# Altium PCB OLED-0.96-Demo-MCU+Board.PcbDoc (part 2 of 2)
Units mil, origin at the board's own origin, x right, y up, seen from the top; angles counter-clockwise.
Board outline 1090.03 x 3263.03 mil, 2 copper layers (Top Layer, Bottom Layer); 60 components, 61 nets, 262 pads, 120 vias.
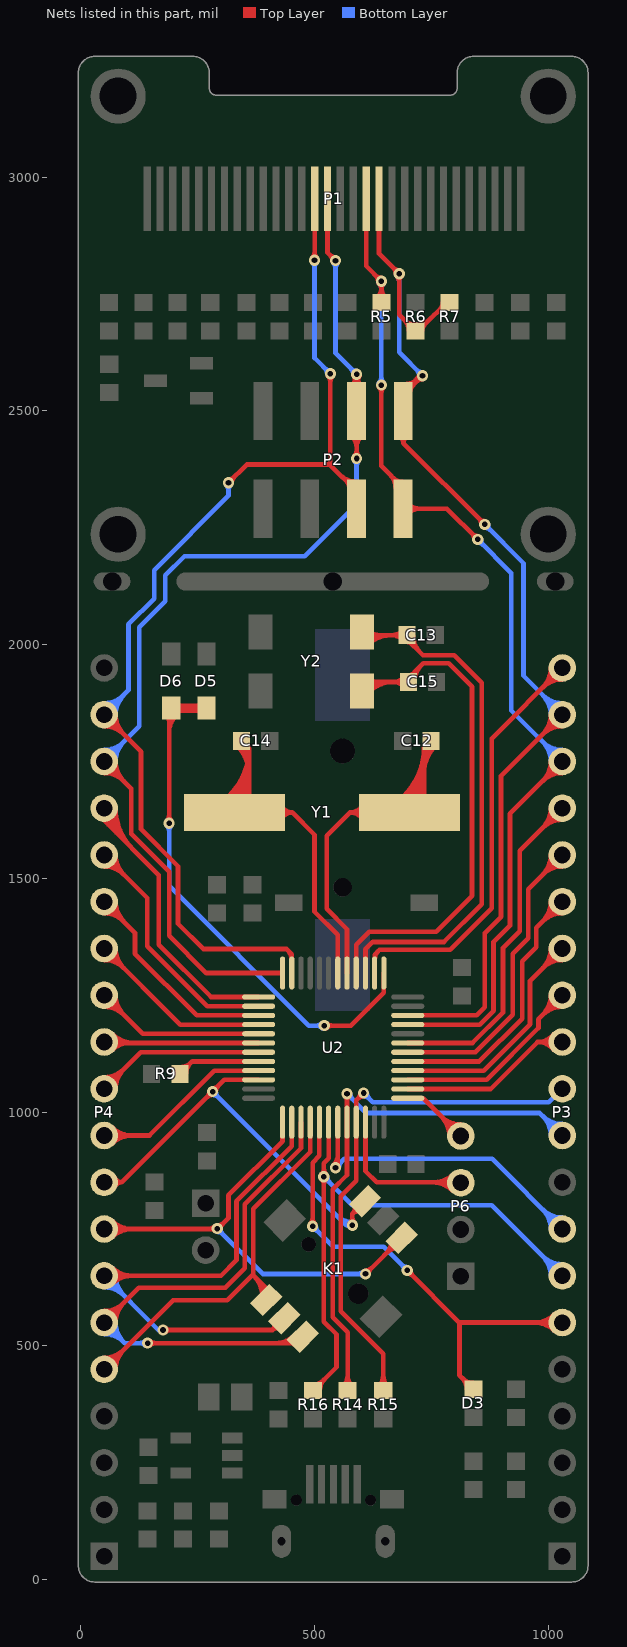
[diagram p2: the nets of this part, all layers, seen from the top]

## Via types
v1: diameter 24, hole 12, Top Layer to Bottom Layer, tented both sides, 120 vias

## Nets (pads, with @x,y where several pads share a name; then routed paths per layer and width w, separated by ;. In a path a pad name is that pad's centre, name@x,y a point inside that pad or via, vN(x,y) a via of type N, cw(c..) or ccw(c..) an arc to the next point about the centre after c; other vN are vias at no path point) (continued)
OLED_D0: P1.18 P2.2 P3.18 R5.2 U2.45 | length 2914.5
  Top Layer w10: P1.18@610.52,2953.2 610.52,2809.7 v1(643.01,2777.2) R5.2@643.01,2731.52 ; R5.2@633.6,2740.92 ccw(c610.89,2763.64) 643.01,2763.64 ccw(c675.14,2763.64) R5.2@652.42,2740.92 ; v1@636.01,2777.2 ccw(c619.11,2777.2) 631.06,2789.15 ccw(c643.01,2801.1) v1@643.01,2784.2 ; v1@638.05,2550.05 cw(c626.1,2538.1) 643,2538.1 cw(c659.9,2538.1) v1@647.95,2550.05 ; v1@638.06,2772.25 cw(c626.11,2760.3) 643.01,2760.3 cw(c659.91,2760.3) v1@647.96,2772.25 ; v1(643,2555) 643,2382 689.01,2335.99 P2.2@689.01,2290.7 783.3,2290.7 v1(849,2225) ; 661.18,2363.82 cw(c630.38,2333.02) P2.2@673.94,2333.02 ; 668.33,2356.67 ccw(c689.01,2377.35) P2.2@689.01,2348.1 ; U2.45@699.45,1187.21 853.17,1187.21 883,1217.04 883,1364 918,1399 918,1638 P3.18@1030,1750 ; P2.2@699.68,2280.04 cw(c725.42,2254.3) 725.42,2290.7 cw(c725.42,2327.1) P2.2@699.68,2301.36 ; v1@842,2225 ccw(c825.1,2225) 837.05,2236.95 ccw(c849,2248.9) v1@849,2232 ; P3.18@1005.47,1750 cw(c946.26,1750) 988.13,1708.13 cw(c1030,1666.26) P3.18@1030,1725.47 ; P3.18@1015.47,1750 cw(c980.4,1750) 1005.2,1725.2 cw(c1030,1700.4) P3.18@1030,1735.47
  Bottom Layer w10: v1@638.05,2559.95 ccw(c626.07,2571.93) 643.01,2571.93 ; v1@638.06,2772.25 cw(c626.11,2760.3) 643.01,2760.3 cw(c659.91,2760.3) v1@647.96,2772.25 ; v1(643,2555) v1(643.01,2777.2) ; 643.01,2571.87 ccw(c659.87,2571.87) v1@647.95,2559.95 ; v1@849,2218 cw(c849,2201.1) 860.95,2213.05 cw(c872.9,2225) v1@856,2225 ; v1(849,2225) 921,2153 921,1859 P3.18@1030,1750 ; P3.18@1005.47,1750 ccw(c946.26,1750) 988.13,1791.87 ccw(c1030,1833.74) P3.18@1030,1774.53 ; P3.18@1015.47,1750 ccw(c980.4,1750) 1005.2,1774.8 ccw(c1030,1799.6) P3.18@1030,1764.53
OLED_D1: P1.19 P2.1 P3.19 R6.1 R7.2 U2.46 | length 3175.1
  Top Layer w10: P1.19@638.08,2953.2 638.08,2836.14 v1(681.01,2793.2) 681.01,2705.89 R6.1@716.01,2670.89 721.7,2670.89 782.33,2731.52 R7.2@789.01,2731.52 ; v1@674.01,2793.2 ccw(c657.11,2793.2) 669.06,2805.15 ccw(c681.01,2817.1) v1@681.01,2800.2 ; v1@676.06,2788.25 cw(c664.11,2776.3) 681.01,2776.3 cw(c697.91,2776.3) v1@685.96,2788.25 ; P2.1@682.36,2444.39 cw(c674.46,2430.99) 690.01,2430.99 ; P2.1@690.01,2547.1 ccw(c690.01,2578.7) 712.36,2556.36 ; P2.1@690.01,2557.1 ccw(c690.01,2612.84) v1@729.43,2573.43 ; 691.62,2695.28 cw(c667.22,2670.89) R6.1@701.72,2670.89 ; 693.99,2692.91 ccw(c715.03,2713.94) R6.1@715.03,2684.19 ; P2.1@697.67,2444.39 ccw(c705.57,2430.99) 690.01,2430.99 ; U2.46@699.45,1206.9 846.9,1206.9 864,1224 864,1383 899,1418 899,1719 P3.19@1030,1850 ; P2.1@705.09,2542.02 cw(c722.16,2542.02) P2.1@710.09,2554.09 ; 715.45,2565.36 ccw(c706.02,2581.69) v1@724.24,2576.81 ; R6.1@717,2684.19 ccw(c717,2727.67) 747.74,2696.93 ; 717.86,2566.75 cw(c725.32,2553.81) v1@729.19,2568.24 ; v1@724,2575 cw(c707.1,2575) 719.05,2563.05 cw(c731,2551.1) v1@731,2568 ; R6.1@730.31,2670.89 cw(c751.08,2670.89) 736.39,2685.58 ; v1(731,2575) 690.01,2534.01 P2.1@690.01,2499.7 690.01,2430.99 ; 755.58,2704.77 cw(c788.03,2672.32) R7.2@788.03,2718.21 ; 769.34,2718.53 ccw(c756.36,2731.52) R7.2@774.72,2731.52 ; v1@857,2257 ccw(c840.1,2257) 852.05,2268.95 ccw(c864,2280.9) v1@864,2264 ; v1(864,2257) 690.01,2430.99 ; P3.19@1005.47,1850 cw(c946.26,1850) 988.13,1808.13 cw(c1030,1766.26) P3.19@1030,1825.47 ; P3.19@1015.47,1850 cw(c980.4,1850) 1005.2,1825.2 cw(c1030,1800.4) P3.19@1030,1835.47
  Bottom Layer w10: v1@676.06,2788.25 cw(c664.11,2776.3) 681.01,2776.3 cw(c697.91,2776.3) v1@685.96,2788.25 ; v1(681.01,2793.2) 681.01,2624.99 v1(731,2575) ; v1@724,2575 ccw(c707.1,2575) 719.05,2586.95 ccw(c731,2598.9) v1@731,2582 ; v1@864,2250 cw(c864,2233.1) 875.95,2245.05 cw(c887.9,2257) v1@871,2257 ; v1(864,2257) 947,2174 947,1933 P3.19@1030,1850 ; P3.19@1005.47,1850 ccw(c946.26,1850) 988.13,1891.87 ccw(c1030,1933.74) P3.19@1030,1874.53 ; P3.19@1015.47,1850 ccw(c980.4,1850) 1005.2,1874.8 ccw(c1030,1899.6) P3.19@1030,1864.53
OLED_DC: P1.15 P2.3 P4.18 U2.12 | length 2931.3
  Top Layer w10: P4.18@50,1725.47 cw(c50,1666.26) 91.87,1708.13 cw(c133.74,1750) P4.18@74.53,1750 ; P4.18@50,1735.47 cw(c50,1700.4) 74.8,1725.2 cw(c99.6,1750) P4.18@64.53,1750 ; P4.18@50,1750 108,1692 108,1595 189,1514 189,1377 268.55,1297.45 U2.12@431.73,1297.45 ; P1.15@527.84,2953.2 527.84,2838.37 v1(545.01,2821.2) ; v1@538.01,2821.2 ccw(c521.11,2821.2) 533.06,2833.15 ccw(c545.01,2845.1) v1@545.01,2828.2 ; P2.3@579.35,2446.71 cw(c553.61,2420.97) 590.01,2420.97 cw(c626.42,2420.97) P2.3@600.68,2446.71 ; P2.3@579.44,2552.78 ccw(c554.67,2577.98) v1(590.01,2577.99) ; v1@583.95,2574.49 cw(c569.32,2566.04) 585.64,2561.66 cw(c601.96,2557.29) v1@593.51,2571.92 ; v1@585.05,2402.95 ccw(c573.07,2414.93) 590.01,2414.93 ; v1@585.06,2573.04 cw(c573.11,2561.09) 590.01,2561.09 cw(c606.91,2561.09) v1@594.96,2573.04 ; v1@586.51,2571.92 cw(c578.07,2557.29) 594.39,2561.66 cw(c610.71,2566.04) v1@596.08,2574.49 ; v1(590,2398) P2.3@590.01,2499.7 v1(590.01,2577.99) ; 590.01,2414.87 ccw(c606.87,2414.87) v1@594.95,2402.95 ; P2.3@600.58,2552.78 cw(c625.36,2577.98) v1(590.01,2577.99)
  Bottom Layer w10: P4.18@50,1750 125,1825 125,2037 181,2093 181,2148 222,2189 479,2189 590,2300 v1(590,2398) ; P4.18@50,1764.53 ccw(c50,1799.6) 74.8,1774.8 ccw(c99.6,1750) P4.18@64.53,1750 ; P4.18@50,1774.53 ccw(c50,1833.74) 91.87,1791.87 ccw(c133.74,1750) P4.18@74.53,1750 ; v1@540.06,2816.25 cw(c528.11,2804.3) 545.01,2804.3 cw(c561.91,2804.3) v1@549.96,2816.25 ; v1(545.01,2821.2) 545.01,2622.99 v1(590.01,2577.99) ; v1@583.01,2577.99 ccw(c566.11,2577.99) 578.06,2589.94 ccw(c590.01,2601.89) v1@590.01,2584.99 ; v1@585.05,2393.05 cw(c573.1,2381.1) 590,2381.1 cw(c606.9,2381.1) v1@594.95,2393.05
OLED_RES: P1.14 P2.4 P4.19 U2.11 | length 2915.5
  Top Layer w10: P4.19@50,1825.47 cw(c50,1766.26) 91.87,1808.13 cw(c133.74,1850) P4.19@74.53,1850 ; P4.19@50,1835.47 cw(c50,1800.4) 74.8,1825.2 cw(c99.6,1850) P4.19@64.53,1850 ; P4.19@50,1850 129,1771 129,1605 208,1526 208,1403 262,1349 440,1349 451.42,1337.58 U2.11@451.42,1297.45 ; v1(316,2346) 355,2385 534,2385 ; v1@316,2353 ccw(c316,2369.9) 327.95,2357.95 ccw(c339.9,2346) v1@323,2346 ; 443.32,1345.68 cw(c425.01,1327.37) U2.11@450.91,1327.37 ; v1@495.06,2827.15 ccw(c482.47,2839.75) 500.28,2839.75 ; v1(500.01,2822.2) 500.28,2822.47 P1.14@500.28,2953.2 ; 500.28,2838.45 ccw(c516.27,2838.45) v1@504.96,2827.15 ; v1@529.05,2574.06 cw(c517.1,2562.11) 534,2562.11 cw(c550.9,2562.11) v1@538.95,2574.06 ; v1(534,2579.01) 534,2384 590.01,2327.99 P2.4@590.01,2290.7 ; 555.67,2362.33 ccw(c590.01,2396.67) P2.4@590.01,2348.1 ; 567.83,2350.17 cw(c550.69,2333.02) P2.4@574.94,2333.02 ; P2.4@572.75,2345.25 ccw(c590.01,2362.52) P2.4@590.01,2338.1
  Bottom Layer w10: P4.19@50,1850 102,1902 102,2043 157,2098 157,2159 316,2318 v1(316,2346) ; P4.19@50,1864.53 ccw(c50,1899.6) 74.8,1874.8 ccw(c99.6,1850) P4.19@64.53,1850 ; P4.19@50,1874.53 ccw(c50,1933.74) 91.87,1891.87 ccw(c133.74,1850) P4.19@74.53,1850 ; v1@311.05,2341.05 cw(c299.1,2329.1) 316,2329.1 cw(c332.9,2329.1) v1@320.95,2341.05 ; v1@495.06,2817.25 cw(c483.11,2805.3) 500.01,2805.3 cw(c516.91,2805.3) v1@504.96,2817.25 ; v1(500.01,2822.2) 500.01,2613 v1(534,2579.01) ; v1@527,2579.01 ccw(c510.1,2579.01) 522.05,2590.96 ccw(c534,2602.91) v1@534,2586.01
OSC32_IN: C13.1 U2.3 Y2.1 | length 1352.6
  Top Layer w10: Y2.1@601.27,2026.99 608.26,2020 C13.1@697.69,2020 697.69,2011.31 732,1977 799,1977 858,1918 858,1445 777,1364 625,1364 608.9,1347.9 U2.3@608.9,1297.45 ; Y2.1@608.76,2007.69 cw(c638.47,1977.98) 638.47,2020 ; Y2.1@615.83,2000.62 cw(c662.61,1953.84) 662.61,2020 ; Y2.1@615.83,2029.74 ccw(c639.34,2053.26) 639.34,2020 ; C13.1@688.28,2010.59 ccw(c665.56,1987.87) 665.56,2020 ccw(c665.56,2052.13) C13.1@688.28,2029.41 ; C13.1@697.69,2005.71 cw(c697.69,1992.17) C13.1@707.26,2001.74 ; C13.1@700.99,2019.02 ccw(c727.57,2019.02) 708.78,2000.22 ; C13.1@710.99,2019.02 ccw(c761.71,2019.02) 725.85,1983.15
OSC32_OUT: C15.1 U2.4 Y2.4 | length 1317.2
  Top Layer w10: U2.4@589.21,1297.45 589.21,1358.21 617,1386 760,1386 837,1463 837,1910 787,1960 733,1960 693,1920 620.26,1920 Y2.4@601.27,1901.01 ; Y2.4@608.76,1905.33 cw(c644.17,1869.91) 644.17,1920 ; Y2.4@615.83,1898.26 cw(c668.31,1845.77) 668.31,1920 ; Y2.4@615.83,1927.38 ccw(c633.64,1945.19) 633.64,1920 ; C15.1@691.28,1910.59 ccw(c668.56,1887.87) 668.56,1920 ccw(c668.56,1952.13) C15.1@691.28,1929.41 ; C15.1@700.69,1934.29 ccw(c700.69,1950.24) C15.1@711.96,1938.96 ; C15.1@703.99,1920.98 cw(c728.15,1920.98) C15.1@711.07,1938.07 ; C15.1@713.99,1920.98 cw(c762.3,1920.98) 728.14,1955.14
OSC_IN: C12.1 U2.5 Y1.1 | length 1461
  Top Layer w10: U2.5@569.53,1297.45 569.53,1391.47 526,1435 526,1591 576,1641 ; Y1.1@603.99,1624.45 ccw(c576,1609.07) 576,1641 ; Y1.1@603.99,1657.55 cw(c576,1672.93) 576,1641 ; Y1.1@612.75,1629.26 ccw(c592.91,1618.36) 592.91,1641 ccw(c592.91,1663.64) Y1.1@612.75,1652.74 ; Y1.1@681.28,1667.63 ccw(c590.69,1778.68) C12.1@734.01,1778.68 ; Y1.1@687.6,1659.88 ccw(c607.88,1757.62) 734.01,1757.62 ; Y1.1@693.92,1652.14 ccw(c625.06,1736.56) 734.01,1736.56 ; Y1.1@700.24,1644.39 ccw(c642.24,1715.5) 734.01,1715.5 ; Y1.1@703.01,1641 576,1641 ; Y1.1@706.57,1636.64 ccw(c659.42,1694.44) 734.01,1694.44 ; Y1.1@712.89,1628.89 ccw(c676.6,1673.37) Y1.1@734.01,1673.37 ; Y1.1@734.01,1641 C12.1@734.01,1778.69 ; 734.01,1723.93 cw(c818.4,1723.93) C12.1@758.72,1783.61 ; 734.01,1748.07 cw(c794.26,1748.07) C12.1@751.65,1790.68 ; 734.01,1772.22 cw(c770.11,1772.22) C12.1@744.58,1797.75 ; C12.1@749.31,1794 C12.1@734.01,1778.69
OSC_OUT: C14.1 U2.6 Y1.2 | length 1404.7
  Top Layer w10: Y1.2@307.42,1667.76 ccw(c218.78,1777.69) C14.1@359.99,1777.69 ; Y1.2@313.7,1659.97 ccw(c235.64,1756.78) 359.99,1756.78 ; Y1.2@319.97,1652.19 ccw(c252.5,1735.87) 359.99,1735.87 ; Y1.2@326.25,1644.4 ccw(c269.36,1714.96) 359.99,1714.96 ; Y1.2@328.99,1641 452,1641 ; Y1.2@332.53,1636.62 ccw(c286.22,1694.05) 359.99,1694.05 ; C14.1@334.28,1783.61 cw(c272.19,1721.52) 359.99,1721.52 ; Y1.2@338.8,1628.83 ccw(c303.08,1673.14) Y1.2@359.99,1673.14 ; C14.1@341.35,1790.68 cw(c296.33,1745.66) 359.99,1745.66 ; C14.1@343.69,1794 C14.1@359.99,1777.69 ; C14.1@348.42,1797.75 cw(c320.47,1769.8) 359.99,1769.8 ; Y1.2@359.99,1641 C14.1@359.99,1777.69 ; Y1.2@429,1626.39 cw(c452,1615.6) 452,1641 ; Y1.2@429,1655.61 ccw(c452,1666.4) 452,1641 ; U2.6@549.84,1297.45 549.84,1379.16 500,1429 500,1593 452,1641
PA3: P4.17 U2.13 | length 869.8
  Top Layer w10: P4.17@44.53,1650 ccw(c94.09,1650) 59.04,1614.96 ; P4.17@50,1650 50,1624 167,1507 167,1358 278.73,1246.27 U2.13@380.55,1246.27 ; P4.17@54.53,1650 ccw(c128.23,1650) 76.11,1597.89 ; P4.17@64.53,1650 ccw(c162.37,1650) 93.18,1580.82 ; P4.17@74.53,1650 ccw(c196.51,1650) 110.26,1563.74
PA4: P4.16 U2.14 | length 673
  Top Layer w10: P4.16@50,1525.47 cw(c50,1466.26) 91.87,1508.13 cw(c133.74,1550) P4.16@74.53,1550 ; P4.16@50,1535.47 cw(c50,1500.4) 74.8,1525.2 cw(c99.6,1550) P4.16@64.53,1550 ; P4.16@50,1550 142,1458 142,1355 270.42,1226.58 U2.14@380.55,1226.58
PA5: P4.15 U2.15 | length 605.7
  Top Layer w10: P4.15@50,1425.47 cw(c50,1366.26) 91.87,1408.13 cw(c133.74,1450) P4.15@74.53,1450 ; P4.15@50,1435.47 cw(c50,1400.4) 74.8,1425.2 cw(c99.6,1450) P4.15@64.53,1450 ; P4.15@50,1450 116,1384 116,1339 248.1,1206.9 U2.15@380.55,1206.9
PA6: P4.14 U2.16 | length 546.1
  Top Layer w10: P4.14@50,1325.47 cw(c50,1266.26) 91.87,1308.13 cw(c133.74,1350) P4.14@74.53,1350 ; P4.14@50,1335.47 cw(c50,1300.4) 74.8,1325.2 cw(c99.6,1350) P4.14@64.53,1350 ; P4.14@50,1350 212.79,1187.21 U2.16@380.55,1187.21
PA7: P4.13 U2.17 | length 512.8
  Top Layer w10: P4.13@50,1225.47 cw(c50,1166.26) 91.87,1208.13 cw(c133.74,1250) P4.13@74.53,1250 ; P4.13@50,1235.47 cw(c50,1200.4) 74.8,1225.2 cw(c99.6,1250) P4.13@64.53,1250 ; P4.13@50,1250 132.47,1167.53 U2.17@380.55,1167.53
PA8: D3.K P3.6 U2.29 | length 1307.7
  Top Layer w10: v1@491.05,760.95 ccw(c479.1,772.9) 496,772.9 ccw(c512.9,772.9) v1@500.95,760.95 ; v1(496,756) 496,892 510.47,906.47 U2.29@510.47,978.55 ; v1@698.5,654.5 cw(c698.5,637.6) 710.45,649.55 cw(c722.4,661.5) v1@705.5,661.5 ; v1(698.5,661.5) 810,550 ; 815.6,431.71 cw(c791.21,407.31) D3.K@825.71,407.31 ; 817.98,429.34 ccw(c839.02,450.37) D3.K@839.02,420.62 ; D3.K@840,407.31 810,437.31 810,550 ; P3.6@1012.66,532.66 ccw(c970.79,490.79) 970.79,550 ccw(c970.79,609.21) P3.6@1012.66,567.34 ; P3.6@1019.73,539.73 ccw(c994.93,514.93) 994.93,550 ccw(c994.93,585.07) P3.6@1019.73,560.27 ; P3.6@1030,550 810,550
  Bottom Layer w10: v1@496,749 cw(c496,732.1) 507.95,744.05 cw(c519.9,756) v1@503,756 ; v1(496,756) 540,712 648,712 v1(698.5,661.5) ; v1@691.5,661.5 ccw(c674.6,661.5) 686.55,673.45 ccw(c698.5,685.4) v1@698.5,668.5
PA9: P3.7 R16.1 U2.30 | length 1486.4
  Top Layer w10: R16.1@497,404.31 547,454.31 547,525 520,552 v1(520,862) 520,891 530.16,901.16 U2.30@530.16,978.55 ; R16.1@497.98,417.62 ccw(c497.98,447.37) 519.02,426.34 ; R16.1@511.29,404.31 cw(c545.79,404.31) 521.4,428.71 ; v1@515.05,857.05 cw(c503.1,845.1) 520,845.1 cw(c536.9,845.1) v1@524.95,857.05 ; v1@515.05,866.95 ccw(c503.1,878.9) 520,878.9 ccw(c536.9,878.9) v1@524.95,866.95
  Bottom Layer w10: v1@520,855 cw(c520,838.1) 531.95,850.05 cw(c543.9,862) v1@527,862 ; v1(520,862) 581,801 879,801 P3.7@1030,650 ; P3.7@1005.47,650 ccw(c946.26,650) 988.13,691.87 ccw(c1030,733.74) P3.7@1030,674.53 ; P3.7@1015.47,650 ccw(c980.4,650) 1005.2,674.8 ccw(c1030,699.6) P3.7@1030,664.53
PA10: P3.8 U2.31 | length 855.5
  Top Layer w10: v1@540.05,885.95 ccw(c516.41,909.59) 549.84,909.59 ; v1(545,881) 549.84,885.84 U2.31@549.84,978.55
  Bottom Layer w10: v1(545,881) 564,900 880,900 P3.8@1030,750 ; v1@545,888 ccw(c545,904.9) 556.95,892.95 ccw(c568.9,881) v1@552,881 ; P3.8@1005.47,750 ccw(c946.26,750) 988.13,791.87 ccw(c1030,833.74) P3.8@1030,774.53 ; P3.8@1015.47,750 ccw(c980.4,750) 1005.2,774.8 ccw(c1030,799.6) P3.8@1030,764.53
PA11: P3.10 R14.1 U2.32 | length 1410.3
  Top Layer w10: R14.1@561.59,413.72 ccw(c538.87,436.44) 571,436.44 ccw(c603.13,436.44) R14.1@580.41,413.72 ; v1@564.58,1034.58 cw(c552.63,1022.63) 569.53,1022.63 cw(c586.43,1022.63) v1@574.48,1034.58 ; v1(569.53,1039.53) U2.32@569.53,978.55 569.53,865.53 539,835 539,561 571,529 R14.1@571,404.31
  Bottom Layer w10: v1@569.53,1032.53 cw(c569.53,1015.63) 581.48,1027.58 cw(c593.43,1039.53) v1@576.53,1039.53 ; v1(569.53,1039.53) 611.05,998 982,998 P3.10@1030,950 ; P3.10@1005.47,950 ccw(c946.26,950) 988.13,991.87 ccw(c1030,1033.74) P3.10@1030,974.53 ; P3.10@1015.47,950 ccw(c980.4,950) 1005.2,974.8 ccw(c1030,999.6) P3.10@1030,964.53
PA12: P3.11 R15.1 U2.33 | length 1243.5
  Top Layer w10: v1@598,1041 cw(c581.1,1041) 593.05,1029.05 cw(c605,1017.1) v1@605,1034 ; v1(605,1041) 589.21,1025.21 U2.33@589.21,978.55 589.21,853.21 556,820 556,574 647,483 R15.1@647,404.31 ; R15.1@637.59,413.72 ccw(c614.87,436.44) 647,436.44 ccw(c679.13,436.44) R15.1@656.41,413.72
  Bottom Layer w10: v1@605,1034 cw(c605,1017.1) 616.95,1029.05 cw(c628.9,1041) v1@612,1041 ; v1(605,1041) 625,1021 1001,1021 P3.11@1030,1050
PA15: P3.12 U2.38 | length 496.4
  Top Layer w10: U2.38@699.45,1049.42 876.42,1049.42 977,1150 ; P3.12@1011.3,1134.13 ccw(c977,1105.01) 977,1150 ; P3.12@1011.3,1165.87 cw(c977,1194.99) 977,1150 ; P3.12@1018.93,1140.6 ccw(c998.61,1123.35) 998.61,1150 ccw(c998.61,1176.65) P3.12@1018.93,1159.4 ; P3.12@1030,1150 977,1150
PB0: P4.12 U2.18 | length 479.6
  Top Layer w10: P4.12@50,1150 52.16,1147.84 U2.18@380.55,1147.84 ; P4.12@60.27,1139.73 cw(c79.86,1120.14) 79.86,1147.84 ; P4.12@60.27,1160.27 ccw(c90.28,1190.28) 90.28,1147.84 ; P4.12@67.34,1132.66 cw(c104.01,1095.99) 104.01,1147.84 ; P4.12@67.34,1167.34 ccw(c114.42,1214.42) 114.42,1147.84
PB1: P4.11 U2.19 | length 511
  Top Layer w10: P4.11@50,1050 128.16,1128.16 U2.19@380.55,1128.16 ; P4.11@50,1064.53 ccw(c50,1099.6) 74.8,1074.8 ccw(c99.6,1050) P4.11@64.53,1050 ; P4.11@50,1074.53 ccw(c50,1133.74) 91.87,1091.87 ccw(c133.74,1050) P4.11@74.53,1050
PB2: R9.2 U2.20 | length 229.7
  Top Layer w10: R9.2@212.32,1082 238.79,1108.47 U2.20@380.55,1108.47 ; R9.2@212.32,1096.29 ccw(c212.32,1130.79) 236.71,1106.4 ; R9.2@225.62,1082.98 cw(c255.37,1082.98) 234.34,1104.02
PB3: P3.13 U2.39 | length 564.7
  Top Layer w10: U2.39@699.45,1069.1 868.1,1069.1 979,1180 979,1199 P3.13@1030,1250 ; P3.13@1005.47,1250 cw(c946.26,1250) 988.13,1208.13 cw(c1030,1166.26) P3.13@1030,1225.47 ; P3.13@1015.47,1250 cw(c980.4,1250) 1005.2,1225.2 cw(c1030,1200.4) P3.13@1030,1235.47
PB4: P3.14 U2.40 | length 641.3
  Top Layer w10: U2.40@699.45,1088.79 861.79,1088.79 961,1188 961,1281 P3.14@1030,1350 ; P3.14@1005.47,1350 cw(c946.26,1350) 988.13,1308.13 cw(c1030,1266.26) P3.14@1030,1325.47 ; P3.14@1015.47,1350 cw(c980.4,1350) 1005.2,1325.2 cw(c1030,1300.4) P3.14@1030,1335.47
PB5: P3.15 U2.41 | length 716.2
  Top Layer w10: U2.41@699.45,1108.47 852.47,1108.47 944,1200 944,1323 974,1353 974,1394 P3.15@1030,1450 ; P3.15@1005.47,1450 cw(c946.26,1450) 988.13,1408.13 cw(c1030,1366.26) P3.15@1030,1425.47 ; P3.15@1015.47,1450 cw(c980.4,1450) 1005.2,1425.2 cw(c1030,1400.4) P3.15@1030,1435.47
PB6: P3.16 U2.42 | length 791.6
  Top Layer w10: U2.42@699.45,1128.16 844.16,1128.16 924,1208 924,1339 957,1372 957,1477 P3.16@1030,1550 ; P3.16@1005.47,1550 cw(c946.26,1550) 988.13,1508.13 cw(c1030,1466.26) P3.16@1030,1525.47 ; P3.16@1015.47,1550 cw(c980.4,1550) 1005.2,1525.2 cw(c1030,1500.4) P3.16@1030,1535.47
PB7: P3.17 U2.43 | length 868.3
  Top Layer w10: U2.43@699.45,1147.84 837.84,1147.84 903,1213 903,1351 939,1387 939,1559 P3.17@1030,1650 ; P3.17@1005.47,1650 cw(c946.26,1650) 988.13,1608.13 cw(c1030,1566.26) P3.17@1030,1625.47 ; P3.17@1015.47,1650 cw(c980.4,1650) 1005.2,1625.2 cw(c1030,1600.4) P3.17@1030,1635.47
PB10: P4.10 U2.21 | length 536.1
  Top Layer w10: P4.10@50,950 147,950 285.79,1088.79 U2.21@380.55,1088.79 ; P4.10@60.27,939.73 cw(c85.07,914.93) 85.07,950 cw(c85.07,985.07) P4.10@60.27,960.27 ; P4.10@67.34,932.66 cw(c109.21,890.79) 109.21,950 cw(c109.21,1009.21) P4.10@67.34,967.34
PB11: K1.3 P4.9 U2.22 | length 1158.6
  Top Layer w10: P4.9@50,850 88,850 ; P4.9@72.35,839.9 cw(c88,832.83) 88,850 ; P4.9@72.35,860.1 ccw(c88,867.17) 88,850 ; v1@275,1044 cw(c258.1,1044) 270.05,1032.05 cw(c282,1020.1) v1@282,1037 ; v1@282,1051 ccw(c282,1067.9) 293.95,1055.95 ccw(c305.9,1044) v1@289,1044 ; U2.22@380.55,1069.1 307.1,1069.1 88,850 ; v1@576.05,762.95 ccw(c564.1,774.9) 581,774.9 ccw(c597.9,774.9) v1@585.95,762.95 ; v1(581,758) 581,782.66 ; K1.3@586.46,800.02 cw(c567.08,796.58) 581,782.66 ; K1.3@598.36,788.12 ccw(c594.92,768.74) 581,782.66 ; K1.3@607.88,809.54 581,782.66
  Bottom Layer w10: v1@282,1037 cw(c282,1020.1) 293.95,1032.05 cw(c305.9,1044) v1@289,1044 ; v1(282,1044) 568,758 ; 546.86,779.14 ccw(c581,813.28) v1@581,765 ; 563.93,762.07 ccw(c581,779.14) v1@581,755 ; v1@575.16,754.15 ccw(c568,749.43) 568,758 ; v1@575.16,761.85 cw(c568,766.57) 568,758 ; v1(581,758) 568,758
PB12: K1.1 P4.8 U2.25 | length 1330.9
  Top Layer w10: P4.8@50,750 v1@292,750 ; P4.8@60.27,739.73 cw(c85.07,714.93) 85.07,750 cw(c85.07,785.07) P4.8@60.27,760.27 ; P4.8@67.34,732.66 cw(c109.21,690.79) 109.21,750 cw(c109.21,809.21) P4.8@67.34,767.34 ; 272.69,750 ccw(c272.69,770.31) v1@287.05,755.95 ; 277.52,750 cw(c277.52,736.52) v1@287.05,746.05 ; v1@292,758 ccw(c292,779.73) 307.36,764.36 ; v1@293,750 316,773 316,822 431.73,937.73 U2.25@431.73,978.55 ; v1@299,751 cw(c311.07,751) 302.54,759.54 ; v1@609,661 ccw(c609,678.67) 621.49,666.17 ; v1@609.16,653.84 K1.1@686.37,731.05 ; v1@616,654 cw(c632.13,654) 620.73,665.41 ; K1.1@664.73,724.09 cw(c629.27,724.09) 654.34,699.03 cw(c679.41,673.96) K1.1@679.41,709.41
  Bottom Layer w10: v1@292,744 cw(c292,727.1) 303.95,739.05 cw(c315.9,751) v1@299,751 ; v1(292,751) 389,654 v1(609,654) ; v1@604.05,649.05 ccw(c592.1,637.1) 592.1,654 ccw(c592.1,670.9) v1@604.05,658.95
PB13: K1.5 P4.7 U2.26 | length 1439.7
  Top Layer w10: P4.7@50,650 300,650 333,683 333,809.04 451.42,927.46 U2.26@451.42,978.55 ; P4.7@60.27,639.73 cw(c85.07,614.93) 85.07,650 cw(c85.07,685.07) P4.7@60.27,660.27 ; P4.7@67.34,632.66 cw(c109.21,590.79) 109.21,650 cw(c109.21,709.21) P4.7@67.34,667.34 ; v1(176,534) 410.12,534 ; v1@180.95,529.05 cw(c192.9,517.1) 192.9,534 cw(c192.9,550.9) v1@180.95,538.95 ; K1.5@414.15,548.66 cw(c399.25,544.88) 410.12,534 ; K1.5@424.78,538.03 ccw(c421,523.13) 410.12,534 ; K1.5@435.35,559.23 410.12,534
  Bottom Layer w10: P4.7@50,625.47 cw(c50,566.26) 91.87,608.13 cw(c133.74,650) P4.7@74.53,650 ; P4.7@50,635.47 cw(c50,600.4) 74.8,625.2 cw(c99.6,650) P4.7@64.53,650 ; P4.7@50,650 166,534 v1(176,534)
PB14: K1.6 P4.6 U2.27 | length 1591.9
  Top Layer w10: P4.6@50,550 124.5,624.5 309.5,624.5 351,666 351,803 471.1,923.1 U2.27@471.1,978.55 ; P4.6@50,564.53 ccw(c50,599.6) 74.8,574.8 ccw(c99.6,550) P4.6@64.53,550 ; P4.6@50,574.53 ccw(c50,633.74) 91.87,591.87 ccw(c133.74,550) P4.6@74.53,550 ; v1(143,506) 461.32,506 K1.6@474.95,519.63 ; v1@147.95,501.05 cw(c159.9,489.1) 159.9,506 cw(c159.9,522.9) v1@147.95,510.95 ; 416.43,506 ccw(c416.43,564.22) K1.6@457.6,523.05 ; 440.57,506 ccw(c440.57,540.08) K1.6@464.67,515.98 ; K1.6@448.63,506 cw(c448.63,493.32) K1.6@457.6,502.29
  Bottom Layer w10: P4.6@50,525.47 cw(c50,466.26) 91.87,508.13 cw(c133.74,550) P4.6@74.53,550 ; P4.6@50,535.47 cw(c50,500.4) 74.8,525.2 cw(c99.6,550) P4.6@64.53,550 ; P4.6@50,550 94,506 v1(143,506) ; v1@138.05,501.05 ccw(c126.1,489.1) 126.1,506 ccw(c126.1,522.9) v1@138.05,510.95
PB15: K1.4 P4.5 U2.28 | length 1072.4
  Top Layer w10: P4.5@50,450 197.5,597.5 313.5,597.5 368,652 ; P4.5@50,464.53 ccw(c50,499.6) 74.8,474.8 ccw(c99.6,450) P4.5@64.53,450 ; P4.5@50,474.53 ccw(c50,533.74) 91.87,491.87 ccw(c133.74,450) P4.5@74.53,450 ; 370.21,649.79 cw(c325.5,605.08) K1.4@388.73,605.08 ; 387.28,632.72 cw(c359.64,605.08) K1.4@398.73,605.08 ; K1.4@396.46,598.12 396.46,623.54 369,651 369,793 490.79,914.79 U2.28@490.79,978.55
PC13: P3.20 U2.2 | length 1073.8
  Top Layer w10: U2.2@628.58,1297.45 628.58,1336.58 639,1347 790,1347 879,1436 879,1799 P3.20@1030,1950 ; U2.2@629.09,1327.37 cw(c652.57,1327.37) 635.97,1343.97 ; P3.20@1005.47,1950 cw(c946.26,1950) 988.13,1908.13 cw(c1030,1866.26) P3.20@1030,1925.47 ; P3.20@1015.47,1950 cw(c980.4,1950) 1005.2,1925.2 cw(c1030,1900.4) P3.20@1030,1935.47
SWCLK: P6.4 U2.37 | length 301.6
  Top Layer w10: U2.37@699.45,1029.73 732.27,1029.73 P6.4@813,949 ; U2.37@729.37,1029.22 cw(c729.37,1020.99) 735.19,1026.81 ; P6.4@788.47,949 ccw(c729.26,949) 771.13,990.87 ccw(c813,1032.74) P6.4@813,973.53 ; P6.4@798.47,949 ccw(c763.4,949) 788.2,973.8 ccw(c813,998.6) P6.4@813,963.53
SWDIO: P6.3 U2.34 | length 466.6
  Top Layer w10: U2.34@608.9,978.55 608.9,874.1 633,850 P6.3@813,850 ; 751.37,850 cw(c751.37,787.37) P6.3@795.66,831.66 ; 756.2,850 ccw(c756.2,905.8) P6.3@795.66,866.34 ; 775.51,850 cw(c775.51,811.51) P6.3@802.73,838.73 ; 780.34,850 ccw(c780.34,881.66) P6.3@802.73,859.27
VBAT: D5.2 D6.2 U2.1 | length 1369
  Top Layer w10: D6.2@183.62,1848.62 cw(c170.62,1835.63) 189,1835.63 cw(c217.38,1835.63) D6.2@197.31,1855.69 ; v1@184.05,1622.95 ccw(c172.1,1634.9) 189,1634.9 ccw(c205.9,1634.9) v1@193.95,1622.95 ; v1(189,1618) 189,1858.93 D6.2@194,1863.93 ; 189,1811.48 cw(c241.52,1811.48) D6.2@204.38,1848.62 ; v1(521,1185) 578,1185 648.27,1255.27 U2.1@648.27,1297.45 ; v1@525.95,1180.05 cw(c537.9,1168.1) 537.9,1185 cw(c537.9,1201.9) v1@525.95,1189.95
  Top Layer w20: D6.2@194,1863.93 D5.2@269,1863.93 ; D6.2@200.85,1857.08 cw(c217.38,1840.55) 217.38,1863.93 cw(c217.38,1887.31) D6.2@200.85,1870.78 ; D5.2@262.15,1857.08 ccw(c245.62,1840.55) 245.62,1863.93 ccw(c245.62,1887.31) D5.2@262.15,1870.78
  Bottom Layer w10: v1@184.05,1613.05 cw(c172.1,1601.1) 189,1601.1 cw(c205.9,1601.1) v1@193.95,1613.05 ; v1(189,1618) 189,1484 488,1185 v1(521,1185) ; v1@516.05,1180.05 ccw(c504.1,1168.1) 504.1,1185 ccw(c504.1,1201.9) v1@516.05,1189.95
pads on no net: B1.3 B1.4 H1.0 H2.0 H3.0 H4.0 K1. P1.7 P2.7 P5. P5.4 Y2.2 Y2.3

## Polygon pours and split planes (outlines as drawn)
DGND on Bottom Layer "Keep-Out Layer-No Net" (solid, remove dead copper, pour order 8): 2,2158 2,3253 1082,3253 1082,2157
DGND on Bottom Layer "Keep-Out Layer-No Net" (solid, remove dead copper, pour order 6): 0,0 1080,0 1080,2118 0,2118
DGND on Top Layer "Keep-Out Layer-No Net" (solid, remove dead copper, pour order 5): 0,0 1080,0 1080,2118 0,2118
DGND on Top Layer "Keep-Out Layer-No Net" (solid, pour order 7): 0,2158 0,3253 1080,3253 1080,2157

## Keep-outs
Keep-Out Layer:
  lines w10: 810,3221.5 810,3190 cw(c790,3190) 790,3170 290,3170 cw(c290,3190) 270,3190 270,3223 ccw(c240,3223) 240,3253 30,3253 ccw(c30,3223) 0,3223 0,30 ccw(c30,30) 30,0 1050,0 ccw(c1050,30) 1080,30 1080,3223 ccw(c1050,3223) 1050,3253 840,3253 ccw(c840,3223) 810,3223

## Other copper
Top Layer:
  rectangle net DGND: 584,194 611.94,254
  rectangle net +5V: 302,129 350,241
  pour cut-out: 461,0 461,170 620,170 622,168 622,7

## Silkscreen, mask and mechanical layers (free items; w line width, h text height)
Top Overlay:
  lines w10: 877,2486 917,2486 ; 880,2567 920,2567 ; 902,2471 917,2486 ; 902,2501 917,2486 ; 905,2552 920,2567 ; 905,2582 920,2567
  text "D1" at 665,2584.53 h60
  text "NC" at 361,2584 h60
  text "CS" at 456,2584 h60
  text "DC" at 556,2584 h60
  text "SDIN" at 939,2554 h60
  text "D0" at 797,2550 h60
  text "SCLK" at 927,2471 h60
  text "D1" at 797,2468 h60
  text "2017-02-25" at 789,2324 h60
  text "3.3~6" at 306,2172 h60
  text "D0" at 666,2172 h60
  text "G" at 472,2171.47 h60
  text "RES" at 544,2171.47 h60
  text "CLK" at 877,935 h50
  text "DIO" at 877,833 h50
  text "G" at 877,732 h60
  text "3.3" at 877,631 h60
Bottom Overlay:
  drawing of 944 lines, arcs and shapes, not listed
  text "0Ω" at 287,2926 h60
  text "4.7KΩ" at 582,2926 h60
  text "R6" at 281,2838.64 h60
  text "R3" at 476,2838.64 h60
  text "R4" at 376,2838 h60
  text "R2" at 574,2838 h60
  text "R1" at 664,2838 h60
  text "4线SPI" at 866,2741 h60
  text "3线SPI" at 865,2641 h60
  text "I2C" at 857,2561 h60
  text "A0" at 205,1935 h60
  text "C13" at 969,1932 h60
  text "A1" at 205,1833 h60
  text "B9" at 969,1830 h60
  text "B8" at 969,1730 h60
  text "A2" at 205,1727 h60
  text "A3" at 205,1630 h60
  text "B7" at 969,1625 h60
  text "B6" at 969,1529 h60
  text "A4" at 205,1527 h60
  text "A5" at 205,1428 h60
  text "B5" at 969,1427 h60
  text "A6" at 205,1329 h60
  text "B4" at 969,1329 h60
  text "B3" at 969,1229 h60
  text "A7" at 205,1226 h60
  text "B0" at 205,1134 h60
  text "A15" at 969,1129 h60
  text "A12" at 969,1032 h60
  text "B1" at 205,1027 h60
  text "CLK" at 760,934 h50
  text "B10" at 205,932 h60
  text "A11" at 969,931 h60
  text "BOOT0" at 249,885 h60 r270
  text "B11" at 205,839 h60
  text "G" at 969,833 h60
  text "DIO" at 760,832 h50
  text "B12" at 205,733 h60
  text "A10" at 969,732 h60
  text "G" at 760,731 h60
  text "A9" at 969,632 h60
  text "B13" at 205,631 h60
  text "3.3" at 760,630 h60
  text "G" at 279,592 h60
  text "B14" at 205,532 h60
  text "A8" at 969,532 h60
  text "B15" at 205,431 h60
  text "G" at 969,429 h60
  text "G" at 969,330 h60
  text "G" at 205,328 h60
  text "G" at 205,229 h60
  text "5V" at 969,227 h60
  text "WWW.SZLCSC.COM" at 325.83,220.28 h70 r270
  text "3.3" at 205,134 h60
  text "5V" at 969,128 h60
  text "5V" at 969,34 h60
  text "3.3" at 205,29 h60
Drill Drawing:
  text ".Legend" at 2,3323 h80

## Dimensions
0,30 to 1080,30 on Mechanical 15
30,3253 to 30,0 on Mechanical 15